# Altium PCB PIPOCPUF_2006.PCBDOC (part 3 of 6)
Units mil, origin at the board's own origin, x right, y up, seen from the top; angles counter-clockwise.
Board outline 8500 x 4525 mil, 2 copper layers (Top Layer, Top, Bottom Layer, Bottom); 345 components, 259 nets, 1116 pads, 603 vias.
Unrouted connection lines stored in the file: 781.
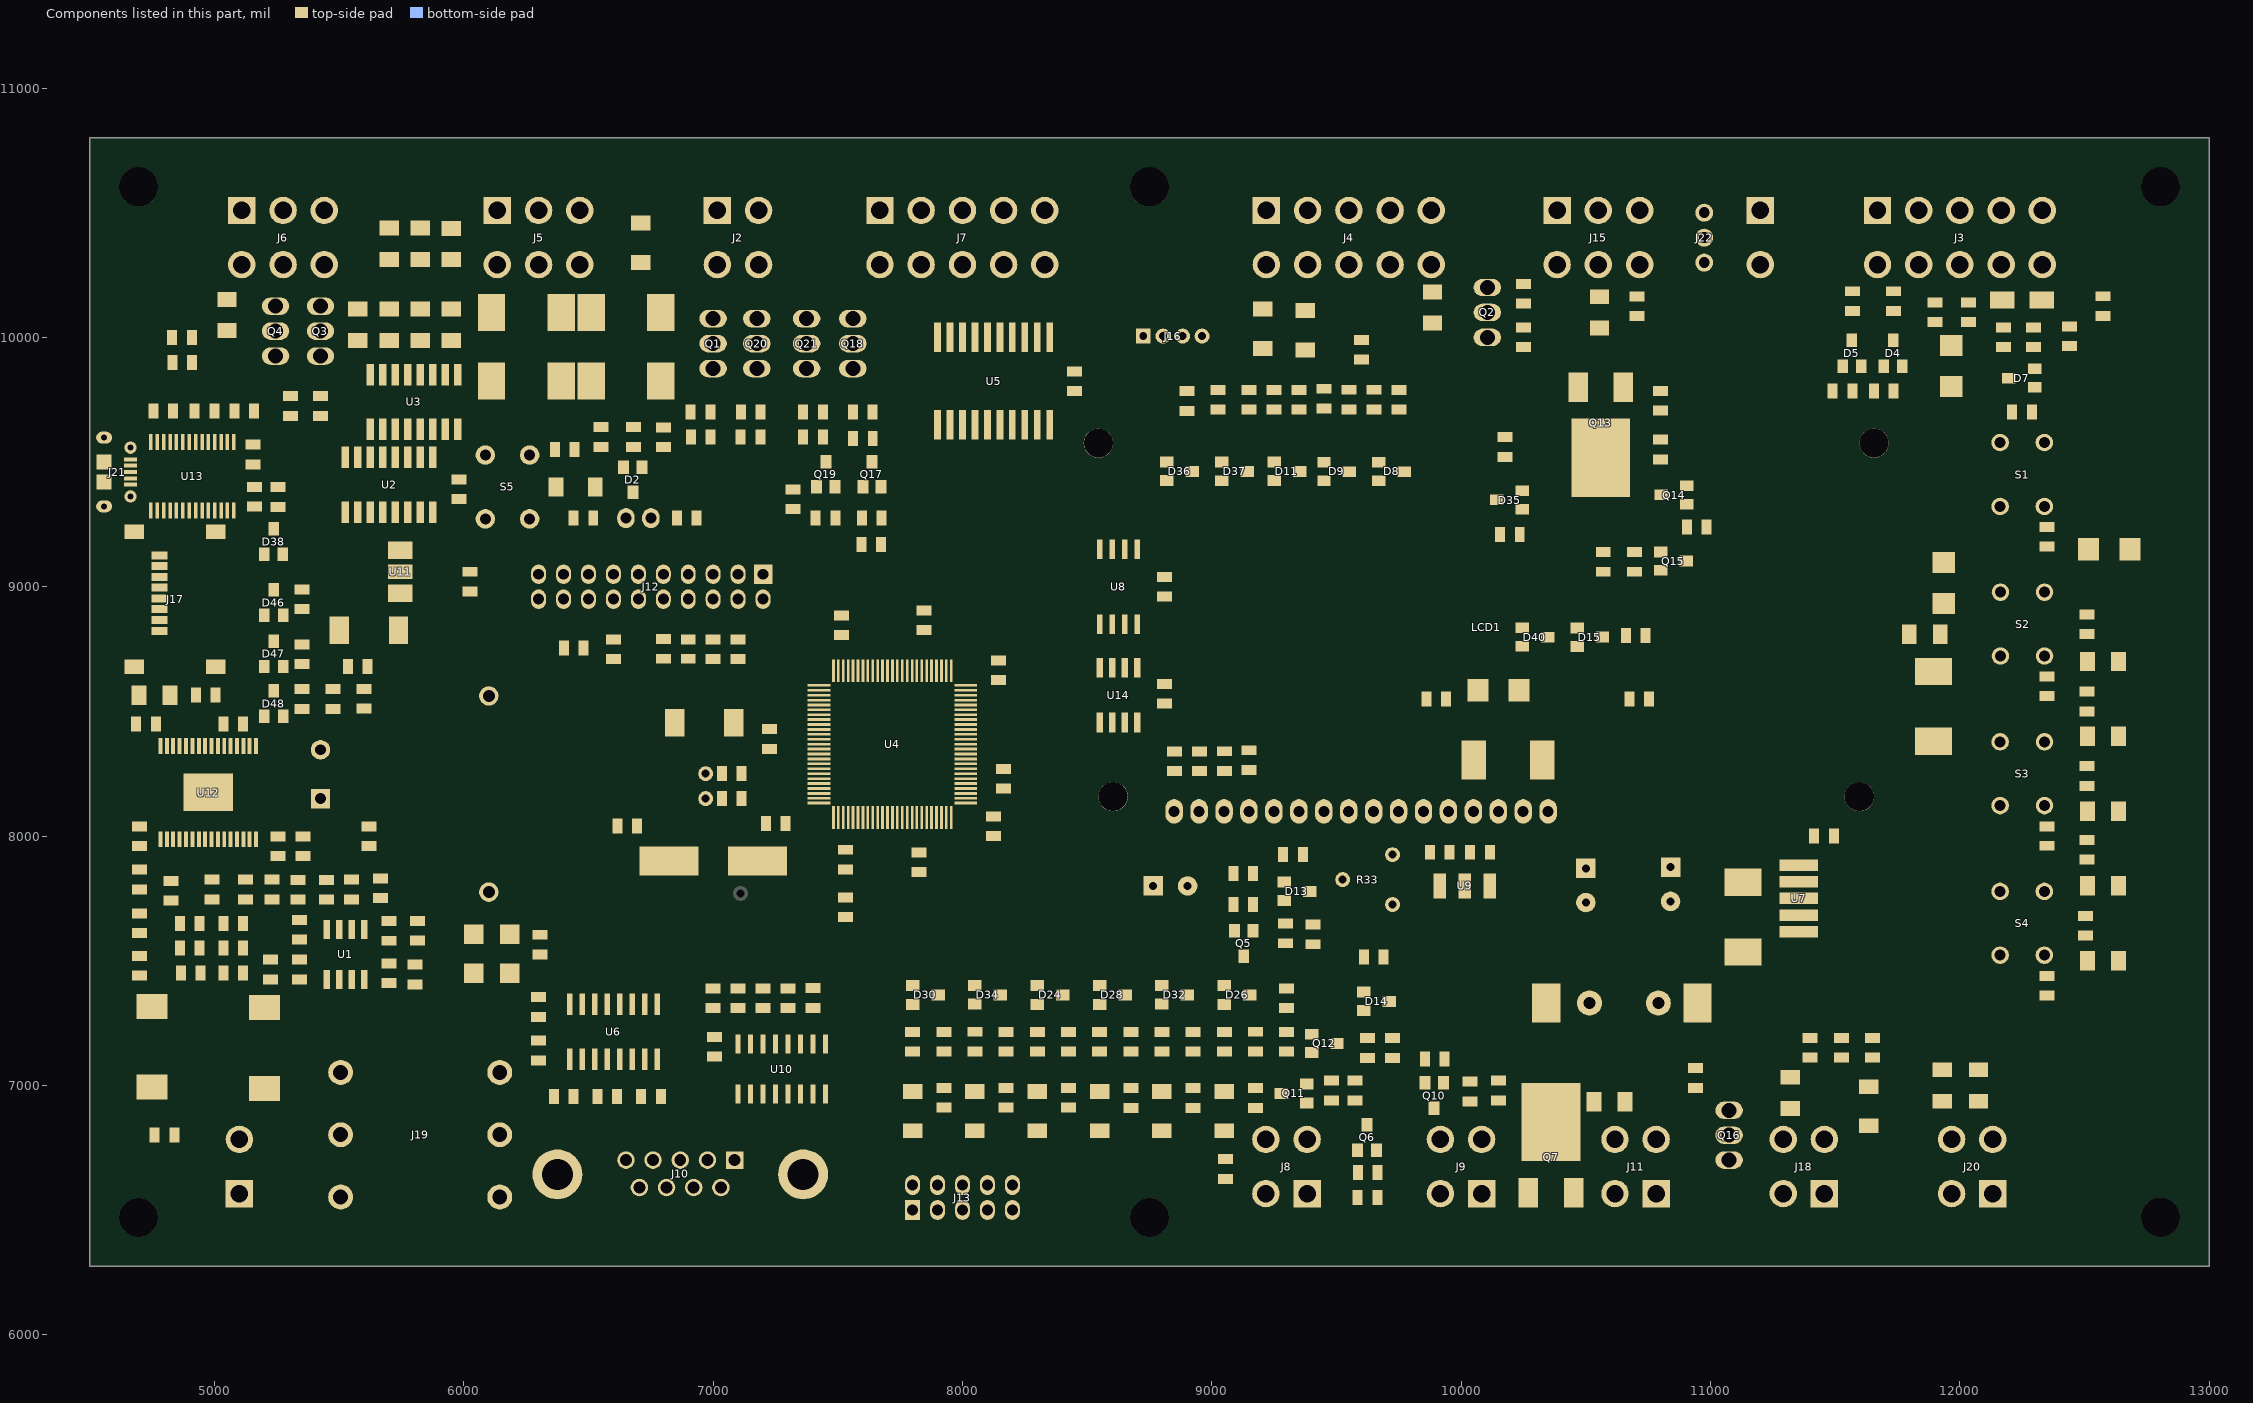
[diagram p3: the components of this part, seen from the top]

## Via types
v1: diameter 28, hole 16, Top Layer, Top to Bottom Layer, Bottom, 595 vias
v2: diameter 36, hole 24, Top Layer, Top to Bottom Layer, Bottom, 4 vias
v3: diameter 40, hole 24, Top Layer, Top to Bottom Layer, Bottom, 4 vias

## Nets (pads, with @x,y where several pads share a name; then routed paths per layer and width w, separated by ;. In a path a pad name is that pad's centre, name@x,y a point inside that pad or via, vN(x,y) a via of type N, cw(c..) or ccw(c..) an arc to the next point about the centre after c; other vN are vias at no path point) (continued)
copper on no net: (continued)
  Top Layer, Top w20: 4729,8739 5156,8739 ; 4729,8754 5156,8754 ; 4729,8769 5156,8769 ; 4729,8784 4733,8784 ; 4785,8955 v1(4840,8955) ; 4826,8784 5156,8784 ; 4830,9900 4830,10000 v1@4830,10285 ; 4836,8799 5156,8799 ; 4838,8814 5156,8814 ; 4888,8874 5152,8874 ; 4889,8859 5152,8859 ; 4889,8889 5152,8889 ; 4906,8904 5152,8904 ; 4915,9905 v1(4970,9905) ; 4915,10000 4945,10000 5025,9920 5230,9920 5305,9845 5305,9765 ; 4921,8919 5154,8919 ; 4936,8934 5156,8934 ; 4951,8949 5156,8949 ; 4962,9144 5072,9144 ; 4965,8964 5156,8964 ; 4966,9159 5057,9159 ; 4971,8979 5156,8979 ; 4973,8994 5156,8994 ; 4973,9009 5156,9009 ; 4973,9024 5156,9024 ; 4973,9039 5156,9039 ; 4973,9054 5156,9054 ; 4973,9069 5156,9069 ; 4973,9084 5145,9084 ; 4976,9129 5087,9129 ; 4978,9099 5117,9099 ; 4980,9114 5102,9114 ; v1(5150,8530) 5150,8525 5195,8480 5195,9125 5195,9130 ; 5155,9490 5185,9490 v1(5215,9520) ; 5156,8829 4870,8829 ; 5165,9690 5215,9640 v1@5215,9525 ; 5253,9566 5381,9566 ; 5253,9581 5381,9581 ; 5253,9596 5381,9596 ; 5253,9611 5378,9611 ; 5253,9626 5382,9626 ; 5260,9641 5262,9641 ; 5275,8500 5335,8500 ; 5275,8680 5350,8680 ; 5285,8490 5285,9125 ; 5290,8900 5360,8900 ; 5290,9135 5295,9140 v1(5295,9230) ; 5292,9536 5381,9536 ; 5298,9521 5381,9521 ; 5299,9446 5381,9446 ; 5299,9461 5381,9461 ; 5299,9476 5381,9476 ; 5299,9491 5381,9491 ; 5299,9506 5381,9506 ; 5305,9356 5381,9356 ; 5308,9431 5381,9431 ; 5309,9371 5381,9371 ; 5311,9386 5381,9386 ; 5311,9401 5381,9401 ; 5311,9416 5381,9416 ; 5331,9341 5381,9341 ; 5346,9326 5381,9326 ; 5347,9641 5382,9641 ; 5356,9311 5381,9311 ; 5358,9716 5371,9716 ; 5358,9731 5371,9731 ; 5359,9656 5370,9656 ; 5361,9671 5368,9671 ; 5361,9686 5368,9686 ; 5361,9701 5368,9701 ; 5361,9746 5368,9746 ; 5362,9296 5381,9296 ; v1@5363,9131 5381,9131 ; v1@5363,9146 v1@5381,9146 ; 5363,9161 5381,9161 ; 5363,9176 5381,9176 ; 5363,9191 5381,9191 ; 5363,9206 5381,9206 ; 5363,9221 5381,9221 ; 5363,9236 5381,9236 ; 5363,9251 5381,9251 ; v1@5363,9266 5381,9266 ; v1@5363,9281 v1@5381,9281 ; 5366,9116 5381,9116 ; 5381,9551 5286,9551 ; v1(5420,9610) 5420,8525 5450,8495 5475,8495 5595,8375 5595,8185 5675,8105 5675,7925 5660,7910 v1(5660,7900) ; 5425,9765 5425,9925 ; 5457,9626 5583,9626 ; v1@5458,8921 5543,8921 ; v1@5458,8936 5558,8936 ; 5458,8951 5573,8951 ; 5458,8966 5580,8966 ; 5458,8981 5580,8981 ; 5458,8996 5580,8996 ; 5458,9011 5580,9011 ; 5458,9026 5580,9026 ; 5458,9041 5580,9041 ; 5458,9056 5580,9056 ; 5458,9071 5580,9071 ; 5458,9086 5580,9086 ; 5458,9101 5583,9101 ; 5458,9116 5589,9116 ; 5458,9131 5598,9131 ; 5458,9146 5613,9146 ; v1@5458,9161 5628,9161 ; v1@5458,9176 5636,9176 ; 5458,9191 5565,9191 ; 5458,9206 5542,9206 ; 5458,9221 5535,9221 ; 5458,9236 5493,9236 ; 5458,9251 5484,9251 ; 5458,9266 5483,9266 ; v1@5458,9281 5483,9281 ; v1@5458,9296 5483,9296 ; 5458,9311 5483,9311 ; 5458,9326 5483,9326 ; 5458,9341 5483,9341 ; 5458,9356 5487,9356 ; 5458,9371 5686,9371 ; 5458,9386 5686,9386 ; 5458,9401 5686,9401 ; 5458,9416 5497,9416 ; 5458,9431 5487,9431 ; 5458,9446 5483,9446 ; 5458,9461 5486,9461 ; 5458,9476 5483,9476 ; 5458,9491 5483,9491 ; 5458,9506 5483,9506 ; 5458,9521 5483,9521 ; 5458,9536 5483,9536 ; 5458,9551 5483,9551 ; 5458,9566 5484,9566 ; 5458,9581 5492,9581 ; 5458,9596 5583,9596 ; 5461,9611 5583,9611 ; 5466,9641 5583,9641 ; 5478,9731 5589,9731 ; 5481,9746 5591,9746 ; 5505,9716 5585,9716 ; 5507,9656 5583,9656 ; 5517,9671 5583,9671 ; 5517,9701 5585,9701 ; 5521,9686 5586,9686 ; v1(5525,9445) 5525,9519 5525,9520 ; 5545,7830 v1@5545,7885 ; 5552,9416 5686,9416 ; 5562,9431 5686,9431 ; 5566,9446 5683,9446 ; v1(5575,9230) 5575,9299 ; 5584,9191 5621,9191 ; 5667,9710 5666,9710 ; 5682,9710 6136,9710 ; 5700,9987 5700,9937 5725,9912 5725,9851 ; 5700,10113 v1(5700,10187) ; 5700,10312 5700,10275 5762,10213 5762,10175 5762,9925 5775,9912 5775,9851 ; 5700,10438 5712,10437 5762,10387 v1(5762,10375) ; 5707,9725 6048,9725 ; 5712,8715 5756,8715 ; 5713,9740 6031,9740 ; 5725,9320 v1(5725,9445) ; 5727,8730 5756,8730 ; 5745,8815 5795,8765 v1(5795,8340) ; 5750,7920 5861,7920 ; 5750,7935 5861,7935 ; 5750,7950 5861,7950 ; 5750,7965 5861,7965 ; 5750,7980 5861,7980 ; 5750,7995 5861,7995 ; 5750,8010 5861,8010 ; 5750,8025 5861,8025 ; 5750,8040 5861,8040 ; 5750,8055 5861,8055 ; 5750,8070 5861,8070 ; 5750,8085 5861,8085 ; 5750,8100 5861,8100 ; 5750,8115 5861,8115 ; 5750,8130 5861,8130 ; 5750,8145 5861,8145 ; 5750,8160 5861,8160 ; 5750,8175 5861,8175 ; 5750,8190 5861,8190 ; 5750,8205 5861,8205 ; 5750,8220 5861,8220 ; 5750,8235 5861,8235 ; 5750,8250 5861,8250 ; 5750,8265 5861,8265 ; 5750,8280 5861,8280 ; 5750,8295 5861,8295 ; 5750,8310 5768,8310 ; 5750,8325 5757,8325 ; 5750,8340 5753,8340 ; 5750,8355 5756,8355 ; 5750,8370 5756,8370 ; 5750,8385 5756,8385 ; 5750,8400 5756,8400 ; 5750,8415 5756,8415 ; 5750,8430 5756,8430 ; 5750,8445 5756,8445 ; 5750,8460 5756,8460 ; 5750,8475 5756,8475 ; 5750,8490 5756,8490 ; 5750,8505 5756,8505 ; 5750,8520 5756,8520 ; 5750,8535 5756,8535 ; 5750,8550 5756,8550 ; 5750,8565 5756,8565 ; 5750,8580 5756,8580 ; 5750,8595 5756,8595 ; 5750,8610 5756,8610 ; 5750,8625 5756,8625 ; 5750,8640 5756,8640 ; 5750,8655 5756,8655 ; 5750,8670 5756,8670 ; 5750,8685 5756,8685 ; 5752,7905 5861,7905 ; 5756,8700 5697,8700 ; 5760,9070 v1(5825,9070) ; 5767,7890 5861,7890 ; 5780,8970 v1(5825,8970) ; 5780,9065 5785,9070 v1(5825,9070) ; 5782,7875 5861,7875 ; 5797,7860 5861,7860 ; 5807,7845 5861,7845 ; 5813,7815 5861,7815 ; 5821,8310 5861,8310 ; 5825,9851 5825,9962 5825,9987 ; 5825,10113 v1(5825,10175) ; 5825,10312 5825,10237 5887,10175 5887,9924 5875,9912 5875,9851 ; 5825,10420 5825,10510 5930,10615 6395,10615 6462,10550 6465,10509 ; 5825,10438 5825,10488 5825,10487 ; 5832,8325 5861,8325 ; v1(5860,8385) 5860,8985 5860,9040 v1(5825,9070) ; 5861,7830 5813,7830 ; 5861,8340 5836,8340 ; 5875,9270 5875,9335 5895,9355 5970,9355 ; 5875,9299 5875,9285 5875,9245 v1(5890,9230) ; 5925,9851 5925,9937 5950,9962 5950,9987 ; 5950,10113 5950,10199 5887,10262 5887,10512 5960,10585 6225,10585 6312,10500 6300,10509 ; 5975,9345 v1(6040,9345) ; 6005,9695 6134,9695 ; 6015,9680 6138,9680 ; 6016,9635 6141,9635 ; 6016,9650 6141,9650 ; 6016,9665 6141,9665 ; 6019,9545 6023,9545 ; 6019,9560 6027,9560 ; 6019,9575 6041,9575 ; 6019,9590 6068,9590 ; 6019,9605 6141,9605 ; 6019,9620 6141,9620 ; 6025,9060 6025,9065 6025,9080 6045,9100 v1(6055,9100) ; 6030,8980 6095,8980 ; 6031,7845 6301,7845 ; 6031,7860 6301,7860 ; 6031,7875 6301,7875 ; 6032,7815 6048,7815 ; 6032,7830 6063,7830 ; 6066,7890 6301,7890 ; 6078,7950 6301,7950 ; 6078,7965 6301,7965 ; 6078,7980 6301,7980 ; 6078,7995 6301,7995 ; 6078,8010 6301,8010 ; 6078,8025 6301,8025 ; 6078,8040 6301,8040 ; 6078,8055 6301,8055 ; 6078,8070 6301,8070 ; 6078,8085 6301,8085 ; 6078,8100 6301,8100 ; 6078,8115 6301,8115 ; 6078,8130 6301,8130 ; 6078,8145 6301,8145 ; 6078,8160 6301,8160 ; 6078,8175 6301,8175 ; 6078,8190 6301,8190 ; 6078,8205 6301,8205 ; 6078,8220 6301,8220 ; 6078,8235 6301,8235 ; 6078,8250 6301,8250 ; 6078,8265 6301,8265 ; 6078,8280 6301,8280 ; 6078,8295 6301,8295 ; 6078,8310 6301,8310 ; 6078,8325 6301,8325 ; 6078,8340 6301,8340 ; 6078,8355 6301,8355 ; 6078,8370 6301,8370 ; 6078,8385 6301,8385 ; 6078,8400 6301,8400 ; 6081,7905 6301,7905 ; 6083,7935 6301,7935 ; 6085,7920 6301,7920 ; 6103,9590 6141,9590 ; 6130,9575 6141,9575 ; 6131,8415 6301,8415 ; 6136,7830 6301,7830 ; 6138,8430 6301,8430 ; 6144,8460 6293,8460 ; 6144,8475 6297,8475 ; 6144,8490 6308,8490 ; 6144,8505 6336,8505 ; 6144,8610 6332,8610 ; 6144,8625 6317,8625 ; 6144,8640 6302,8640 ; 6144,8655 6287,8655 ; 6144,8670 6272,8670 ; 6144,8685 6257,8685 ; 6144,8700 6242,8700 ; 6144,8715 6227,8715 ; 6144,8730 6212,8730 ; 6144,8745 6197,8745 ; 6144,8760 6182,8760 ; 6144,8775 6167,8775 ; v1@6144,8790 v1@6152,8790 ; v1@6144,8805 v1@6145,8805 ; 6149,8520 6336,8520 ; 6151,7815 6301,7815 ; 6160,8535 6336,8535 ; 6162,8580 6336,8580 ; 6164,8550 6336,8550 ; 6166,8565 6336,8565 ; 6297,8445 6144,8445 ; 6300,7100 6295,7100 6355,7100 6375,7120 6375,7155 6395,7175 6460,7175 6475,7160 6475,7105 ; 6300,7179 6300,7265 6300,7275 6380,7275 6400,7255 6460,7255 6475,7270 6475,7325 ; 6300,7354 6315,7365 6320,7370 6410,7370 6425,7355 6425,7325 v1(6385,7325) ; 6336,8595 6158,8595 ; 6361,6955 6360,7015 6425,7080 6425,7105 ; v1@6400,7465 v1@6791,7465 ; 6400,7480 6788,7480 ; 6400,7495 6784,7495 ; 6400,8770 6400,8950 6400,8965 ; 6406,7510 6786,7510 ; 6431,7525 6793,7525 ; 6439,6955 6450,6960 ; 6445,9555 6540,9555 ; 6446,7540 6819,7540 ; 6450,6985 6525,7060 6525,7105 ; 6450,7555 6458,7555 ; 6511,7555 6911,7555 ; 6518,7615 6911,7615 ; 6518,7630 6911,7630 ; 6518,7645 6911,7645 ; 6518,7660 6911,7660 ; 6518,7675 6911,7675 ; 6518,7690 6911,7690 ; 6518,7705 6631,7705 ; 6518,7720 6607,7720 ; 6518,7735 6592,7735 ; 6518,7750 v1@6577,7750 ; 6518,7765 6562,7765 ; 6518,7780 6547,7780 ; 6518,7795 6532,7795 ; v1(6520,9220) 6520,9265 ; 6522,7570 6911,7570 ; 6522,7600 6911,7600 ; 6525,7325 6525,7220 6565,7180 6795,7180 6820,7155 6820,7060 6845,7035 6845,6785 6813,6752 6813,6672 6845,6640 6890,6640 6950,6700 6977,6700 ; 6527,9400 6527,9358 6560,9325 6560,9135 6550,9125 6550,8730 6570,8710 6605,8710 6600,8710 v1(6600,8660) 6535,8595 6535,7985 6605,7915 v1(6605,7905) ; 6536,6955 6535,7010 6575,7050 6575,7105 ; 6545,9400 6545,9550 ; 6545,9640 6795,9640 ; 6555,9565 6635,9485 ; 6573,8445 6580,8445 ; 6573,8460 6780,8460 ; 6573,8475 6780,8475 ; 6573,8490 6780,8490 ; 6573,8505 6780,8505 ; 6573,8520 6782,8520 ; 6573,8535 6802,8535 ; 6573,8550 7206,8550 ; v1@6573,8565 7206,8565 ; 6575,7325 6575,7245 6610,7210 6820,7210 6855,7175 6855,7080 6885,7050 6885,6770 6868,6753 6868,6700 ; 6575,8580 6942,8580 ; v1(6580,8385) 6585,8395 6610,8420 6625,8420 6840,8420 ; v1(6580,10300) 6580,10405 6635,10460 6695,10460 ; 6590,8595 6827,8595 ; 6605,8610 6813,8610 ; 6615,6955 6625,6970 6625,7105 ; 6622,8625 6809,8625 ; 6636,8640 6811,8640 ; 6640,8655 6816,8655 ; 6647,8670 6753,8670 ; 6650,6700 6790,6840 v1(6790,6860) 6790,6955 6790,6980 ; 6651,8283 6924,8283 ; 6651,8745 6702,8745 ; 6654,8760 6702,8760 ; 6655,8685 6740,8685 ; 6656,8700 6725,8700 ; 6656,8715 6712,8715 ; 6656,8775 6702,8775 ; 6656,8790 6702,8790 ; 6657,8268 6916,8268 ; 6659,8103 6877,8103 ; 6659,8118 6882,8118 ; 6659,8133 6897,8133 ; 6659,8148 6912,8148 ; 6659,8163 6915,8163 ; 6659,8178 6919,8178 ; 6659,8193 6934,8193 ; 6659,8208 6932,8208 ; 6659,8223 6919,8223 ; 6659,8238 6915,8238 ; 6659,8253 6912,8253 ; 6659,8805 6702,8805 ; 6670,9650 6670,10295 ; 6674,8820 6702,8820 ; 6675,7105 6675,6990 6710,6955 6711,6955 ; 6681,8835 6702,8835 ; 6687,8865 6702,8865 ; 6687,8880 6708,8880 ; 6702,8850 6687,8850 ; 6705,8730 6656,8730 ; 6725,9470 6760,9470 6775,9485 v1(6800,9485) ; 6732,8088 6883,8088 ; 6739,8073 6893,8073 ; 6800,9570 6800,9560 6800,9550 ; 6830,7540 6911,7540 ; v1(6850,9700) 6915,9700 ; 6856,7525 6911,7525 ; 6858,7465 6911,7465 ; 6861,7480 6911,7480 ; 6863,7510 6911,7510 ; 6865,7495 6911,7495 ; 6872,8595 6917,8595 ; 6886,8610 6911,8610 ; 6889,8535 7039,8535 ; 6890,8625 6910,8625 ; 6900,8950 6950,9000 6950,9265 6940,9275 6940,9325 v1@6925,9340 ; 6909,8520 7019,8520 ; 6911,7585 6526,7585 ; 6911,8430 7017,8430 ; 6911,8445 7017,8445 ; 6911,8460 7017,8460 ; 6911,8475 7017,8475 ; 6911,8490 7017,8490 ; 6911,8505 7017,8505 ; v1@6930,9345 v1(6930,9485) ; 6939,8298 6641,8298 ; 6944,9523 7151,9523 ; 6950,9538 7151,9538 ; 6957,8580 7206,8580 ; 6963,9508 7151,9508 ; 6968,9358 7151,9358 ; 6968,9373 7151,9373 ; 6968,9388 7151,9388 ; 6968,9403 7151,9403 ; v1@6968,9418 7151,9418 ; 6968,9433 7151,9433 ; 6968,9448 7151,9448 ; 6968,9463 7151,9463 ; 6969,9478 7151,9478 ; 6969,9493 7151,9493 ; 6971,9343 v1@7151,9343 ; 6974,7720 7080,7720 ; 6977,9328 7151,9328 ; 6978,7495 7357,7495 ; 6978,7510 7344,7510 ; 6978,7525 7338,7525 ; 6978,7540 7336,7540 ; 6978,7555 7336,7555 ; 6978,7570 7336,7570 ; 6978,7585 7336,7585 ; 6978,7600 7336,7600 ; 6978,7615 7336,7615 ; 6978,7630 7336,7630 ; 6978,7645 7336,7645 ; 6978,7660 7336,7660 ; 6978,7675 7336,7675 ; 6978,7690 7336,7690 ; 6978,7705 7336,7705 ; 6978,9313 7151,9313 ; 6980,9298 7151,9298 ; 6981,9283 7152,9283 ; 6982,8595 7037,8595 ; 6987,9268 7158,9268 ; 6988,8610 7012,8610 ; 6988,9118 7161,9118 ; 6988,9133 7161,9133 ; 6988,9148 7161,9148 ; 6988,9163 7161,9163 ; 6988,9178 7161,9178 ; 6988,9193 7161,9193 ; 6988,9208 7159,9208 ; 6988,9223 7162,9223 ; 6988,9238 7171,9238 ; 6988,9253 7169,9253 ; 6989,8625 7006,8625 ; 6990,9605 6990,9870 ; 7000,7400 v1(7000,7450) ; 7005,7195 v1(7005,7240) ; 7026,7480 7168,7480 ; 7028,9748 7072,9748 ; 7029,9553 7070,9553 ; 7032,9658 7067,9658 ; 7035,9103 7065,9103 ; 7035,9673 7064,9673 ; 7035,9688 7064,9688 ; 7035,9703 7064,9703 ; 7035,9718 7064,9718 ; 7035,9733 7064,9733 ; 7036,9568 7063,9568 ; 7036,9583 7063,9583 ; 7036,9598 7063,9598 ; 7036,9613 7063,9613 ; 7036,9628 7063,9628 ; v1@7037,7465 7161,7465 ; 7052,8595 7206,8595 ; 7077,8610 7206,8610 ; 7083,8625 7187,8625 ; 7085,8435 7225,8435 ; 7100,7165 7100,7215 7120,7230 v1(7120,7260) ; v1(7100,8670) 7100,8710 ; 7115,9595 7115,9815 7175,9875 ; 7126,8535 v1@7206,8535 ; 7127,8640 7147,8640 ; 7135,9103 7140,9103 ; 7139,7720 7336,7720 ; 7146,8520 7206,8520 ; 7148,8475 7152,8475 ; 7148,8490 7216,8490 ; 7148,8505 7210,8505 ; 7157,8475 7194,8475 ; 7162,8640 7173,8640 ; 7195,9700 7270,9700 ; 7200,8950 7200,9050 v1(7200,9210) ; 7231,7480 7372,7480 ; v1@7238,7465 7362,7465 ; v1(7270,9895) 7270,9700 ; v1(7350,6860) 7350,6960 ; 7355,9700 7270,9700 ; 7375,9870 7440,9805 7440,9600 ; v1(7400,6860) 7400,6965 ; 7400,7390 v1(7400,7450) ; 7408,8832 7426,8832 ; 7408,8847 7426,8847 ; 7408,8862 7426,8862 ; 7408,8877 7426,8877 ; 7408,8892 7426,8892 ; 7408,8907 7426,8907 ; 7408,8922 7426,8922 ; 7408,8937 7426,8937 ; 7408,8952 7426,8952 ; 7408,8967 7426,8967 ; 7408,8982 7426,8982 ; 7408,8997 7426,8997 ; 7408,9012 7426,9012 ; 7408,9027 7426,9027 ; 7408,9042 7426,9042 ; 7408,9057 7426,9057 ; 7408,9072 7426,9072 ; 7408,9087 7420,9087 ; 7408,9102 7420,9102 ; 7408,9117 7425,9117 ; 7408,9132 7443,9132 ; 7408,9147 7548,9147 ; 7408,9162 7548,9162 ; 7408,9177 7548,9177 ; 7408,9192 7548,9192 ; 7408,9207 7549,9207 ; 7444,9222 7456,9222 ; v1(7450,6860) 7450,6960 ; 7476,9132 7550,9132 ; 7479,9747 7520,9747 ; 7483,9642 7521,9642 ; 7483,9657 7516,9657 ; 7486,9567 7514,9567 ; 7486,9582 7514,9582 ; 7486,9597 7514,9597 ; 7486,9612 7514,9612 ; 7486,9627 7514,9627 ; 7486,9672 7513,9672 ; 7486,9687 7513,9687 ; 7486,9702 7513,9702 ; 7486,9717 7513,9717 ; 7486,9732 7513,9732 ; 7493,8937 7547,8937 ; 7493,8952 7547,8952 ; 7493,8967 7547,8967 ; 7493,8982 7547,8982 ; 7493,8997 7547,8997 ; 7493,9012 7547,9012 ; 7493,9027 7547,9027 ; 7493,9042 7547,9042 ; 7493,9057 7547,9057 ; 7493,9072 7542,9072 ; 7494,9117 7557,9117 ; 7497,9462 7591,9462 ; 7499,9087 7540,9087 ; 7499,9102 7544,9102 ; 7517,9552 7487,9552 ; 7523,9222 7557,9222 ; 7524,9537 7590,9537 ; 7527,9447 7561,9447 ; 7528,9477 7588,9477 ; 7531,9327 7558,9327 ; 7533,9342 7558,9342 ; 7534,9237 7551,9237 ; 7534,9357 7557,9357 ; v1(7535,7490) 7535,7670 ; 7535,9312 7550,9312 ; 7536,9252 7549,9252 ; 7536,9267 7549,9267 ; 7536,9282 7549,9282 ; 7536,9297 7549,9297 ; 7536,9432 7552,9432 ; 7536,9522 7588,9522 ; 7537,9372 7551,9372 ; 7537,9387 7551,9387 ; 7537,9402 7551,9402 ; 7537,9417 7551,9417 ; 7537,9492 7588,9492 ; 7540,9507 7588,9507 ; 7580,10055 7610,10055 7665,10000 7665,9735 7630,9700 v1(7700,9700) ; 7685,10505 7750,10440 7750,10210 7900,10060 7900,10040 ; 7800,7215 7800,7315 ; 7800,7396 7800,7400 v1(7800,7451) ; v1(7820,7495) 7820,7855 ; 7900,9640 7900,9990 ; 7923,8855 7929,8855 ; 7923,8870 7933,8870 ; 7923,8885 7948,8885 ; 7923,8900 7983,8900 ; 7923,8915 8010,8915 ; 7923,8930 8036,8930 ; 7923,8945 8036,8945 ; 7923,8960 8036,8960 ; 7923,8975 8036,8975 ; 7923,8990 8036,8990 ; 7923,9005 8036,9005 ; 7923,9020 8036,9020 ; 7923,9035 8036,9035 ; 7923,9050 8036,9050 ; 7923,9065 8036,9065 ; 7923,9080 8036,9080 ; 7923,9095 8036,9095 ; 7923,9110 8036,9110 ; 7923,9125 8036,9125 ; 7923,9140 8036,9140 ; 7923,9155 8036,9155 ; 7923,9170 8036,9170 ; 7923,9185 8036,9185 ; 7923,9200 8036,9200 ; 7923,9215 8036,9215 ; 7923,9230 8036,9230 ; 7923,9245 8036,9245 ; 7923,9260 8036,9260 ; 7923,9275 8023,9275 ; 7923,9290 8012,9290 ; 7923,9305 8008,9305 ; 7923,9320 8012,9320 ; 7923,9335 8023,9335 ; 7923,9350 8027,9350 ; 7923,9365 8012,9365 ; 7923,9380 7997,9380 ; 7923,9395 7944,9395 ; v1(7925,6860) 7925,6911 7925,6915 ; v1(7950,9825) 7950,9975 ; 7955,9395 7982,9395 ; 8019,8915 v1@8036,8915 ; 8042,7495 8204,7495 ; 8050,7216 8050,7316 ; 8050,7396 8050,7400 v1(8050,7451) ; 8057,7510 8206,7510 ; 8072,7525 8205,7525 ; 8077,7480 8208,7480 ; 8085,7540 8205,7540 ; 8087,7465 8207,7465 ; 8091,7555 8205,7555 ; 8093,7570 8205,7570 ; 8093,7585 8205,7585 ; 8093,7600 8205,7600 ; 8093,7615 8205,7615 ; 8093,7630 8205,7630 ; 8093,7645 8204,7645 ; 8093,7660 8204,7660 ; 8093,7675 8204,7675 ; 8093,7690 8164,7690 ; 8093,7705 8158,7705 ; 8093,7720 8152,7720 ; 8093,7735 8150,7735 ; 8093,7750 8150,7750 ; 8093,7765 8150,7765 ; 8093,7780 8150,7780 ; 8093,7795 8150,7795 ; 8093,7810 8150,7810 ; 8093,7825 8150,7825 ; 8093,7840 8150,7840 ; 8093,7855 8150,7855 ; 8093,7870 8150,7870 ; 8093,7885 8150,7885 ; 8093,7900 8150,7900 ; 8093,7915 8150,7915 ; 8093,7930 8150,7930 ; 8093,7945 8150,7945 ; 8130,8000 8185,8000 ; v1(8175,6860) 8175,6911 8175,6915 ; 8185,8265 8185,8260 8225,8220 8225,8135 8240,8120 8245,7510 v1(8245,7500) ; 8300,7215 8300,7315 ; 8300,7396 8300,7400 v1(8300,7451) ; 8300,9665 v1(8300,9825) ; 8350,9665 v1(8350,9825) ; 8398,7540 8616,7540 ; 8398,7555 8616,7555 ; 8398,7570 8616,7570 ; 8398,7585 8612,7585 ; 8398,7600 8608,7600 ; 8398,7615 8612,7615 ; 8398,7630 8623,7630 ; 8398,7645 8850,7645 ; 8398,7660 8850,7660 ; 8398,7675 8850,7675 ; 8398,7690 8850,7690 ; 8398,7705 8850,7705 ; 8398,7720 8850,7720 ; 8398,7735 8423,7735 ; 8398,7750 8408,7750 ; 8398,7765 8404,7765 ; 8398,7780 8406,7780 ; 8398,7795 8413,7795 ; 8398,7810 8421,7810 ; 8398,7825 8421,7825 ; 8398,7840 8421,7840 ; 8402,7525 8617,7525 ; 8417,7510 8617,7510 ; v1(8425,6860) 8425,6911 8425,6915 ; 8432,7495 8617,7495 ; 8440,9785 8450,9785 8500,9785 8525,9810 v1(8525,9825) ; 8447,7480 8522,7480 ; 8450,9870 v1(8450,9915) ; 8462,7465 8512,7465 ; 8466,7735 8722,7735 ; 8468,7945 8751,7945 ; 8468,7960 8501,7960 ; 8468,7975 8477,7975 ; 8477,7930 8746,7930 ; 8481,7750 8702,7750 ; 8484,7915 8744,7915 ; 8485,7765 8699,7765 ; 8488,7795 8699,7795 ; 8488,7810 8699,7810 ; 8488,7825 8699,7825 ; 8488,7840 8699,7840 ; 8488,7855 8705,7855 ; 8488,7870 8993,7870 ; 8488,7885 8763,7885 ; 8488,7900 8748,7900 ; 8523,9212 8525,9212 ; 8523,9227 8611,9227 ; 8523,9242 8605,9242 ; 8529,9257 8605,9257 ; 8544,9272 8610,9272 ; 8550,7215 8550,7315 ; 8550,7396 8550,7400 v1(8550,7451) ; v1(8550,9075) 8550,9135 ; 8559,9287 8629,9287 ; 8574,9302 8786,9302 ; 8577,7480 8617,7480 ; 8587,7465 8617,7465 ; 8589,9317 8786,9317 ; v1(8600,8605) 8600,8665 ; v1(8600,9075) 8600,9150 ; 8604,9332 8786,9332 ; 8619,9347 8786,9347 ; 8634,9362 8786,9362 ; 8649,9377 8786,9377 ; 8650,8455 8650,8620 8650,8675 8650,8835 8650,8850 v1(8650,9075) ; 8660,9287 8786,9287 ; 8664,9392 8769,9392 ; v1(8675,6859) 8675,6910 8675,6914 ; 8676,7630 8850,7630 ; 8678,9227 8786,9227 ; 8679,9272 8786,9272 ; 8679,9407 8766,9407 ; 8683,7555 8850,7555 ; 8683,7570 8850,7570 ; 8684,7465 8762,7465 ; 8684,7480 8772,7480 ; 8684,7495 8815,7495 ; 8684,7510 8821,7510 ; 8684,7525 8827,7525 ; 8684,7540 8850,7540 ; 8684,9242 8786,9242 ; 8684,9257 8786,9257 ; 8687,7585 8850,7585 ; 8687,7615 8850,7615 ; 8694,9422 8766,9422 ; 8699,7780 8488,7780 ; 8700,8695 v1(8700,8745) ; 8700,8845 8700,8850 v1(8700,8920) ; 8703,7960 8751,7960 ; 8709,9437 8766,9437 ; v1@8724,9452 8767,9452 ; 8727,7975 8751,7975 ; 8735,9197 8786,9197 ; 8736,9107 8770,9107 ; 8737,9122 8782,9122 ; 8737,9137 8786,9137 ; 8737,9152 8786,9152 ; 8737,9167 8786,9167 ; 8737,9182 8786,9182 ; 8739,9467 8768,9467 ; 8742,7990 8751,7990 ; 8745,9092 8761,9092 ; 8745,9482 8766,9482 ; 8748,9497 8766,9497 ; 8748,9512 8766,9512 ; 8748,9527 8767,9527 ; 8748,9542 8776,9542 ; 8748,9557 8770,9557 ; 8748,9572 8764,9572 ; 8748,9587 8761,9587 ; 8748,9602 8761,9602 ; 8748,9617 8761,9617 ; 8748,9632 8761,9632 ; 8748,9647 8761,9647 ; 8748,9662 8761,9662 ; 8748,9677 8761,9677 ; 8748,9692 8761,9692 ; 8748,9707 8761,9707 ; 8748,9722 8761,9722 ; 8748,9737 8761,9737 ; 8786,9212 8724,9212 ; 8800,7216 8800,7316 ; 8800,7396 8800,7400 v1(8800,7451) ; 8800,9035 8840,9035 8865,9010 v1(8865,8745) 8865,8715 8825,8675 8825,8620 ; 8800,9045 v1(8800,9080) ; v1@8800,9085 8825,9110 8825,9375 8825,9425 ; 8800,10020 v1(8800,9825) 8800,9580 v1@8820,9560 ; 8806,7885 9008,7885 ; 8807,7735 8850,7735 ; v1(8810,8910) 8810,8960 ; 8815,8535 8855,8535 8875,8555 v1(8875,8615) ; 8818,7945 9208,7945 ; 8818,7960 9234,7960 ; 8818,7975 9249,7975 ; 8818,7990 9324,7990 ; 8818,8005 9328,8005 ; 8818,8020 9343,8020 ; 8820,9505 v1(8820,9555) ; 8821,7900 9049,7900 ; 8823,7930 9201,7930 ; 8824,7855 8866,7855 ; 8825,7915 9199,7915 ; 8827,7750 8850,7750 ; 8830,7765 8846,7765 ; 8830,7780 8841,7780 ; 8830,7795 8837,7795 ; 8830,7810 8838,7810 ; 8830,7825 8842,7825 ; 8830,7840 8851,7840 ; 8850,7600 8691,7600 ; 8856,9079 9331,9079 ; 8857,9094 9331,9094 ; 8860,8494 8921,8494 ; 8863,9109 9331,9109 ; 8863,9124 9331,9124 ; 8863,9139 9331,9139 ; 8863,9154 9331,9154 ; 8863,9169 9331,9169 ; 8863,9184 9331,9184 ; 8863,9199 9331,9199 ; 8863,9214 9331,9214 ; 8863,9229 9331,9229 ; 8863,9244 9114,9244 ; 8863,9259 8899,9259 ; 8863,9274 8884,9274 ; 8863,9289 8880,9289 ; 8863,9304 8881,9304 ; 8863,9319 8887,9319 ; 8863,9334 8888,9334 ; 8863,9349 8888,9349 ; 8864,8659 8921,8659 ; 8865,9064 9331,9064 ; 8866,9364 8888,9364 ; 8870,9379 8888,9379 ; 8871,9394 8888,9394 ; 8873,9409 8888,9409 ; 8873,9424 8874,9424 ; 8879,8674 8921,8674 ; 8880,9049 9331,9049 ; 8882,8479 8921,8479 ; 8884,8509 8921,8509 ; 8885,8035 8912,8035 ; 8888,8389 8921,8389 ; 8888,8404 8921,8404 ; 8888,8419 8921,8419 ; 8892,8434 8921,8434 ; 8892,8464 8921,8464 ; 8893,8689 8921,8689 ; 8893,9034 9331,9034 ; 8896,8449 8921,8449 ; 8899,8524 8921,8524 ; 8899,8704 8921,8704 ; 8900,9019 9331,9019 ; 8902,8644 8921,8644 ; 8903,8719 8921,8719 ; 8903,8734 8921,8734 ; 8903,8764 8921,8764 ; 8903,8779 8921,8779 ; 8903,8794 8916,8794 ; 8903,8809 8914,8809 ; 8903,8824 8918,8824 ; 8903,8839 8932,8839 ; 8903,8854 9331,8854 ; 8903,8869 9331,8869 ; 8903,8884 9331,8884 ; 8903,8899 9331,8899 ; 8903,8914 9331,8914 ; 8903,8929 9331,8929 ; 8903,8944 9331,8944 ; 8903,8959 9331,8959 ; 8903,8974 9331,8974 ; 8903,8989 9331,8989 ; 8903,9004 9331,9004 ; 8905,8749 8921,8749 ; 8907,8539 8921,8539 ; 8912,8629 8921,8629 ; 8913,8554 8921,8554 ; 8913,8569 8921,8569 ; 8913,8584 8921,8584 ; 8913,8599 8921,8599 ; 8916,8614 8921,8614 ; v1(8925,6859) 8925,6910 8925,6914 ; 8932,9619 9007,9619 ; 8932,9634 8995,9634 ; 8932,9649 8989,9649 ; 8937,7465 9011,7465 ; 8939,7855 8989,7855 ; 8943,7480 9011,7480 ; 8944,9604 9022,9604 ; 8946,9664 8987,9664 ; 8949,7510 9011,7510 ; 8949,7525 9011,7525 ; 8949,7540 9011,7540 ; 8949,7555 9011,7555 ; 8949,7570 9011,7570 ; 8949,7585 9011,7585 ; 8949,7600 9015,7600 ; 8949,7615 9021,7615 ; 8949,7630 9034,7630 ; 8949,7645 9041,7645 ; 8949,7660 9041,7660 ; 8949,7675 9041,7675 ; 8949,7690 9040,7690 ; 8949,7705 9039,7705 ; 8949,7720 9039,7720 ; 8949,7735 9039,7735 ; 8949,7750 9039,7750 ; 8952,9739 8970,9739 ; 8953,9589 9018,9589 ; 8954,7840 8991,7840 ; 8955,9319 9106,9319 ; 8955,9334 9106,9334 ; 8955,9349 9016,9349 ; 8955,9364 9007,9364 ; 8955,9379 9001,9379 ; 8955,9394 8988,9394 ; 8955,9409 8986,9409 ; 8955,9679 8970,9679 ; 8956,9694 8968,9694 ; 8956,9709 8968,9709 ; 8956,9724 8968,9724 ; 8958,9304 9106,9304 ; 8959,7765 9041,7765 ; 8959,9289 9102,9289 ; 8959,9514 8986,9514 ; 8959,9529 8988,9529 ; 8959,9544 8998,9544 ; 8959,9559 9000,9559 ; 8959,9574 9004,9574 ; 8963,7825 8998,7825 ; 8964,7780 9058,7780 ; 8967,7810 9024,7810 ; 8968,7795 9058,7795 ; 8969,9424 8986,9424 ; 8971,9499 8986,9499 ; 8975,9439 8986,9439 ; 8975,9454 8988,9454 ; 8975,9469 8988,9469 ; 8975,9484 8986,9484 ; 8977,8839 9331,8839 ; 8985,8035 9012,8035 ; 8988,8389 9016,8389 ; 8988,8404 9016,8404 ; 8988,8419 9016,8419 ; 8988,8434 9016,8434 ; 8988,8449 v1@9016,8449 ; 8988,8464 9016,8464 ; 8988,8479 9016,8479 ; 8988,8494 9016,8494 ; 8988,8509 9016,8509 ; 8988,8524 9016,8524 ; 8988,8539 9016,8539 ; 8988,8554 9016,8554 ; 8988,8569 9011,8569 ; 8988,8584 9009,8584 ; 8988,8599 9013,8599 ; 8988,8614 9027,8614 ; 8988,8629 9331,8629 ; 8988,8644 9331,8644 ; 8988,8659 9331,8659 ; 8988,8674 9331,8674 ; 8988,8689 9331,8689 ; 8988,8704 9331,8704 ; 8988,8719 9331,8719 ; 8988,8734 9331,8734 ; 8988,8749 9331,8749 ; 8988,8764 9331,8764 ; 8988,8779 9331,8779 ; 8991,8824 9331,8824 ; 8993,8794 9331,8794 ; 8995,8809 9331,8809 ; 9011,7495 8949,7495 ; 9035,7810 9041,7810 ; 9040,9504 v1(9040,9554) ; v1@9045,9374 9045,9424 ; 9050,7215 9050,7315 ; 9050,7396 9050,7400 v1(9050,7451) ; v1@9050,7455 9050,7590 9080,7620 9080,7725 ; 9072,8614 9331,8614 ; 9073,9349 9106,9349 ; 9082,9364 9106,9364 ; 9083,8389 9113,8389 ; 9083,8404 9116,8404 ; 9083,8419 9116,8419 ; 9083,8434 v1@9116,8434 ; 9083,8449 9116,8449 ; 9083,8464 9116,8464 ; 9083,8479 9116,8479 ; 9083,8494 9116,8494 ; 9083,8509 9116,8509 ; 9083,8524 9116,8524 ; 9083,8539 9114,8539 ; 9083,8554 9110,8554 ; 9085,8035 9112,8035 ; 9086,8599 9141,8599 ; 9088,8569 9111,8569 ; 9090,8584 9117,8584 ; 9091,9394 9106,9394 ; 9093,9409 9106,9409 ; 9098,9274 8955,9274 ; 9102,9259 8940,9259 ; 9106,9379 9086,9379 ; 9113,7780 9127,7780 ; 9113,7795 9127,7795 ; 9122,7900 9128,7900 ; 9150,9710 9150,9640 9195,9595 9195,9450 9220,9425 9240,9425 ; 9158,8599 9331,8599 ; 9165,9244 9331,9244 ; 9173,9304 9331,9304 ; 9173,9319 9331,9319 ; 9173,9334 9331,9334 ; 9173,9349 9226,9349 ; 9173,9364 9217,9364 ; 9173,9379 9213,9379 ; 9173,9394 9198,9394 ; 9173,9409 9180,9409 ; v1(9175,6859) 9175,6910 9175,6914 ; 9177,9259 9331,9259 ; 9177,9289 9331,9289 ; 9181,9274 9331,9274 ; 9182,8584 9331,8584 ; 9183,8404 9331,8404 ; 9183,8419 9331,8419 ; 9183,8434 9331,8434 ; 9183,8449 9331,8449 ; 9183,8464 9331,8464 ; 9183,8479 9331,8479 ; 9183,8494 9331,8494 ; 9183,8509 9331,8509 ; 9183,8524 9331,8524 ; 9185,8035 9212,8035 ; 9186,8389 v1@9331,8389 ; 9187,8164 9214,8164 ; 9187,8179 9615,8179 ; 9187,8194 9614,8194 ; 9187,8209 9614,8209 ; 9188,8569 9331,8569 ; 9189,8554 9331,8554 ; 9196,8224 9339,8224 ; 9201,7900 9203,7900 ; 9202,7780 9239,7780 ; 9202,7795 9236,7795 ; 9202,8299 9331,8299 ; 9204,8314 9331,8314 ; 9204,8374 9331,8374 ; 9205,8239 9327,8239 ; 9206,8254 9323,8254 ; 9206,8269 9327,8269 ; 9206,8284 9331,8284 ; 9206,8329 9331,8329 ; 9206,8344 9331,8344 ; 9206,8359 9331,8359 ; 9209,7765 9224,7765 ; 9209,7810 9236,7810 ; 9210,7885 9218,7885 ; 9211,7825 9236,7825 ; 9211,7840 9236,7840 ; 9211,7855 9244,7855 ; 9211,7870 9251,7870 ; v1(9235,7725) 9250,7735 9260,7740 9295,7740 9295,7660 ; v1(9240,7920) 9275,7920 9290,7920 ; 9250,9505 v1(9250,9555) ; v1@9255,9375 9255,9425 ; 9283,9349 9331,9349 ; 9284,8164 9314,8164 ; 9285,8035 9312,8035 ; 9290,7810 9290,7815 9290,7920 ; 9290,7940 9290,7920 ; 9292,9364 9331,9364 ; 9301,9394 9331,9394 ; 9303,9409 9331,9409 ; 9303,9424 9304,9424 ; v1(9305,7075) 9305,7135 ; 9322,7975 9326,7975 ; 9331,8539 9185,8539 ; 9331,9379 9296,9379 ; 9380,6935 9575,6935 ; 9380,7010 v1(9425,7010) 9440,7025 9475,7025 ; 9384,8164 9414,8164 ; 9385,8035 9412,8035 ; 9386,8020 9589,8020 ; 9390,8224 9614,8224 ; 9398,8284 9614,8284 ; 9398,8299 9614,8299 ; 9398,8314 9614,8314 ; 9398,8329 9614,8329 ; 9398,8344 9614,8344 ; 9398,8359 9614,8359 ; 9398,8374 9613,8374 ; 9398,8389 v1@9613,8389 ; 9398,8404 v1@9613,8404 ; 9398,8419 9613,8419 ; 9398,8434 9613,8434 ; 9398,8449 9613,8449 ; 9398,8464 9613,8464 ; 9398,8479 9613,8479 ; 9398,8494 9613,8494 ; 9398,8509 9613,8509 ; 9398,8524 9613,8524 ; 9398,8539 9613,8539 ; 9398,8554 9612,8554 ; 9398,8569 9612,8569 ; 9398,8584 9612,8584 ; 9398,8599 9612,8599 ; 9398,8614 9612,8614 ; 9398,8629 9612,8629 ; 9398,8644 9612,8644 ; 9398,8659 9612,8659 ; 9398,8674 9612,8674 ; 9398,8689 9612,8689 ; 9398,8704 9612,8704 ; 9398,8719 9612,8719 ; 9398,8734 9612,8734 ; 9398,8749 9611,8749 ; 9398,8764 9611,8764 ; 9398,8779 9611,8779 ; 9398,8794 9611,8794 ; 9398,8809 9611,8809 ; 9398,8824 9607,8824 ; 9398,8839 9603,8839 ; 9398,8854 9607,8854 ; 9398,8869 9617,8869 ; 9398,8884 10000,8884 ; 9398,8899 10000,8899 ; 9398,8914 10000,8914 ; 9398,8929 10000,8929 ; 9398,8944 10000,8944 ; 9398,8959 10000,8959 ; 9398,8974 10000,8974 ; 9398,8989 10000,8989 ; 9398,9004 10000,9004 ; 9398,9019 10000,9019 ; 9398,9034 10000,9034 ; 9398,9049 10000,9049 ; 9398,9064 10000,9064 ; 9398,9079 10000,9079 ; 9398,9094 10000,9094 ; 9398,9109 10000,9109 ; 9398,9124 10000,9124 ; 9398,9139 10000,9139 ; 9398,9154 10000,9154 ; 9398,9169 10000,9169 ; 9398,9184 10000,9184 ; 9398,9199 10000,9199 ; 9398,9214 10000,9214 ; 9398,9229 10000,9229 ; 9398,9244 10000,9244 ; 9398,9259 10000,9259 ; 9398,9274 10000,9274 ; 9398,9289 10000,9289 ; 9398,9304 10000,9304 ; 9398,9319 10000,9319 ; 9398,9334 10000,9334 ; 9398,9349 9426,9349 ; 9398,9364 9417,9364 ; 9398,9379 9413,9379 ; 9401,8005 9563,8005 ; 9402,7870 9490,7870 ; 9402,8239 9614,8239 ; 9402,8269 9614,8269 ; 9403,7975 9554,7975 ; v1(9405,7075) 9405,7135 ; 9405,7990 9556,7990 ; 9406,8254 9614,8254 ; 9409,7885 9561,7885 ; 9410,7960 9558,7960 ; 9411,7900 9561,7900 ; 9411,7915 9561,7915 ; 9411,7930 9561,7930 ; 9411,7945 9561,7945 ; 9413,7855 9475,7855 ; 9421,7840 9471,7840 ; 9434,7720 9526,7720 ; 9434,7735 9526,7735 ; 9440,7705 9526,7705 ; 9442,7690 9526,7690 ; 9443,7810 9471,7810 ; 9444,7750 9530,7750 ; 9445,7765 9537,7765 ; 9445,7780 9490,7780 ; 9445,7795 9475,7795 ; 9447,7465 9526,7465 ; 9447,7480 9526,7480 ; 9447,7495 9526,7495 ; 9447,7510 9526,7510 ; 9450,7525 9526,7525 ; 9450,9504 v1(9450,9554) ; v1@9455,9374 9455,9424 ; 9457,7600 9526,7600 ; 9459,7615 9526,7615 ; 9459,7675 9526,7675 ; 9460,7540 9526,7540 ; 9461,7555 9526,7555 ; 9461,7570 9526,7570 ; 9461,7585 9526,7585 ; 9461,7630 9526,7630 ; 9461,7645 9526,7645 ; 9461,7660 9526,7660 ; 9483,9349 9646,9349 ; 9484,8164 9514,8164 ; 9485,8035 9512,8035 ; 9492,9364 9637,9364 ; 9496,9379 9633,9379 ; 9501,9394 9618,9394 ; 9503,9409 9610,9409 ; 9503,9424 9504,9424 ; 9559,7870 9561,7870 ; 9584,8164 9614,8164 ; 9585,8035 9612,8035 ; 9593,7585 9651,7585 ; 9593,7600 9651,7600 ; 9593,7615 9648,7615 ; 9593,7630 9644,7630 ; 9593,7645 9646,7645 ; 9593,7660 9653,7660 ; 9593,7675 9679,7675 ; 9593,7690 9680,7690 ; 9593,7705 9672,7705 ; 9593,7720 9668,7720 ; 9600,8020 9696,8020 ; 9602,7735 9669,7735 ; 9610,7300 9620,7290 9620,7195 ; 9617,7750 9673,7750 ; 9624,7765 9685,7765 ; 9626,8005 9696,8005 ; 9628,7780 9713,7780 ; 9628,7795 9761,7795 ; 9628,7810 9768,7810 ; 9628,7825 9766,7825 ; 9628,7840 9764,7840 ; 9628,7855 9767,7855 ; 9628,7870 9713,7870 ; 9628,7885 9685,7885 ; 9628,7900 9673,7900 ; 9628,7915 9669,7915 ; 9628,7930 9668,7930 ; 9628,7945 9672,7945 ; 9631,7960 9680,7960 ; 9633,7990 9696,7990 ; 9635,7975 9695,7975 ; 9637,7570 9651,7570 ; 9650,9715 9650,9660 9620,9630 9620,9455 9660,9415 ; 9670,6650 9670,6745 ; 9670,9504 v1(9670,9554) ; 9672,8869 10000,8869 ; 9675,6650 9720,6605 9720,6450 ; v1@9675,9374 9675,9424 ; 9678,8764 10000,8764 ; 9678,8779 10000,8779 ; 9678,8794 10000,8794 ; 9678,8809 10000,8809 ; 9679,8584 9815,8584 ; 9679,8599 9823,8599 ; 9679,8614 9826,8614 ; 9679,8629 9824,8629 ; 9679,8644 9820,8644 ; 9679,8659 9821,8659 ; 9679,8674 9827,8674 ; 9679,8689 9851,8689 ; 9679,8704 10000,8704 ; 9679,8719 10000,8719 ; 9679,8734 10000,8734 ; 9679,8749 10000,8749 ; v1@9680,8389 9914,8389 ; v1@9680,8404 9902,8404 ; 9680,8419 9898,8419 ; 9680,8434 9902,8434 ; 9680,8449 9906,8449 ; 9680,8464 9906,8464 ; 9680,8479 9906,8479 ; 9680,8494 9836,8494 ; 9680,8509 9816,8509 ; 9680,8524 9814,8524 ; 9680,8539 9814,8539 ; 9680,8554 9814,8554 ; 9680,8569 9814,8569 ; 9681,8209 9981,8209 ; 9681,8224 9974,8224 ; 9681,8239 9974,8239 ; 9681,8254 9974,8254 ; 9681,8269 9974,8269 ; 9681,8284 9974,8284 ; 9681,8299 9974,8299 ; 9681,8314 9974,8314 ; 9681,8329 9974,8329 ; 9681,8344 9974,8344 ; 9681,8359 9974,8359 ; 9681,8374 9974,8374 ; 9682,8179 9999,8179 ; 9682,8194 9999,8194 ; 9682,8824 10000,8824 ; 9682,8854 10000,8854 ; 9684,8164 9714,8164 ; 9685,8035 9696,8035 ; 9686,8839 10000,8839 ; 9690,7675 9695,7675 ; 9695,8010 9755,8070 ; 9703,9349 10000,9349 ; 9712,9364 10000,9364 ; 9716,7660 9733,7660 ; 9716,9379 10000,9379 ; 9718,7570 9733,7570 ; 9718,7585 9733,7585 ; 9718,7600 9733,7600 ; 9721,7615 9733,7615 ; 9721,9394 10000,9394 ; 9723,7645 9733,7645 ; 9723,9409 10000,9409 ; 9723,9424 9724,9424 ; 9725,7630 9733,7630 ; 9735,7935 9735,8095 9750,8110 ; 9736,7780 9759,7780 ; 9736,7870 9767,7870 ; v1(9755,9555) 9755,9710 ; v1(9760,6485) v1(9760,7010) ; 9764,7885 9767,7885 ; 9784,8164 9814,8164 ; 9816,7540 9959,7540 ; 9816,7555 9959,7555 ; 9816,7570 9959,7570 ; 9816,7585 9959,7585 ; 9816,7600 9959,7600 ; 9816,7615 9959,7615 ; 9816,7630 9959,7630 ; 9816,7645 9959,7645 ; 9816,7660 9959,7660 ; 9816,7675 9959,7675 ; 9823,7690 9959,7690 ; 9828,9499 10000,9499 ; 9838,7705 9959,7705 ; 9842,9514 10000,9514 ; 9844,7720 9959,7720 ; 9852,9484 10000,9484 ; 9854,9529 10000,9529 ; 9855,7005 9855,7010 9855,7105 9855,7235 ; 9858,9469 10000,9469 ; 9859,9454 10000,9454 ; 9860,9544 10000,9544 ; 9861,7525 9959,7525 ; 9862,9559 10000,9559 ; 9862,9574 10000,9574 ; 9862,9589 10000,9589 ; 9862,9604 10000,9604 ; 9862,9619 10000,9619 ; 9862,9634 10000,9634 ; 9862,9649 10000,9649 ; 9862,9664 10000,9664 ; 9862,9679 10000,9679 ; 9862,9694 10000,9694 ; 9862,9709 10000,9709 ; 9862,9724 10000,9724 ; 9862,9739 10000,9739 ; 9868,7735 9851,7735 ; 9868,8689 10000,8689 ; 9872,7480 9959,7480 ; 9872,7510 9959,7510 ; 9873,7465 9959,7465 ; 9884,8164 9914,8164 ; 9885,8494 9906,8494 ; 9892,8674 10000,8674 ; 9893,8614 9998,8614 ; 9898,8599 9902,8599 ; 9898,8659 10000,8659 ; 9899,8644 10000,8644 ; 9959,7495 9876,7495 ; 9965,8389 9975,8389 ; 9973,8449 10000,8449 ; 9973,8464 10000,8464 ; 9973,8479 10000,8479 ; 9973,8494 10000,8494 ; 9977,8404 9985,8404 ; 9977,8434 10000,8434 ; 9977,8599 9998,8599 ; 9981,8419 10000,8419 ; 9984,8164 9999,8164 ; 9984,8509 10000,8509 ; 9985,8584 9998,8584 ; 9986,8524 10000,8524 ; 9986,8539 9998,8539 ; 9986,8554 9998,8554 ; 9986,8569 9998,8569 ; 9998,8629 9895,8629 ; v1(10000,7075) 10000,7185 ; 10000,9424 9840,9424 ; 10000,9439 9855,9439 ; 10180,9406 10191,9406 ; 10180,9421 10196,9421 ; 10184,9391 10191,9391 ; 10185,9436 10199,9436 ; 10200,9451 10203,9451 ; 10207,9466 10215,9466 ; 10212,9646 10415,9646 ; 10212,9661 10415,9661 ; v1@10212,9676 10415,9676 ; v1@10212,9691 10422,9691 ; 10212,9706 10499,9706 ; 10212,9721 10412,9721 ; 10212,9736 10404,9736 ; 10222,9481 10276,9481 ; 10225,8926 10536,8926 ; 10225,8941 10536,8941 ; 10225,8956 10536,8956 ; 10225,8971 10536,8971 ; 10225,8986 10536,8986 ; 10225,9001 10536,9001 ; 10225,9016 10526,9016 ; 10226,9556 10274,9556 ; 10228,9631 10415,9631 ; 10229,9031 10515,9031 ; 10229,9571 10278,9571 ; 10230,9496 10276,9496 ; 10231,9511 10276,9511 ; 10231,9526 10276,9526 ; 10231,9586 10290,9586 ; 10231,9601 10415,9601 ; 10231,9616 10415,9616 ; 10240,8750 10275,8715 v1(10275,8710) ; 10240,9385 v1(10240,9435) ; 10244,9046 10513,9046 ; 10245,8605 v1(10310,8605) ; 10245,8835 v1(10245,8885) ; 10259,9061 10513,9061 ; 10260,9310 10270,9310 10310,9350 10315,9355 10315,9365 v1(10315,9450) v1(10315,9555) ; 10264,9466 10276,9466 ; 10274,8911 10435,8911 ; 10274,9076 10513,9076 ; 10276,9541 10231,9541 ; 10283,8896 10426,8896 ; 10283,9091 10516,9091 ; 10285,8881 10424,8881 ; 10289,9106 10516,9106 ; 10295,9121 10513,9121 ; 10295,9136 10513,9136 ; 10295,9151 10513,9151 ; 10295,9166 10515,9166 ; 10295,9181 10525,9181 ; 10295,9196 10862,9196 ; 10295,9211 10859,9211 ; 10295,9226 10859,9226 ; 10295,9241 10859,9241 ; 10295,9256 10859,9256 ; 10295,9271 10859,9271 ; 10296,8866 10413,8866 ; 10298,8836 10300,8836 ; 10298,8851 10411,8851 ; 10301,9286 10863,9286 ; 10321,9301 10853,9301 ; 10339,9586 10415,9586 ; 10343,9316 10851,9316 ; 10349,9331 10754,9331 ; 10351,9346 10418,9346 ; 10351,9571 10415,9571 ; 10353,9376 10415,9376 ; 10353,9391 10415,9391 ; 10353,9406 10415,9406 ; 10353,9421 10415,9421 ; 10353,9436 10415,9436 ; 10353,9466 10415,9466 ; 10353,9481 10415,9481 ; 10353,9496 10415,9496 ; 10353,9511 10415,9511 ; 10353,9526 10415,9526 ; 10353,9541 10415,9541 ; 10354,9361 10415,9361 ; 10355,9451 10415,9451 ; 10355,9556 10415,9556 ; 10380,8746 10411,8746 ; 10393,8836 10411,8836 ; 10395,8731 10413,8731 ; 10395,8761 10411,8761 ; 10400,8776 10411,8776 ; 10400,8791 10413,8791 ; 10400,8806 10412,8806 ; 10400,8821 10411,8821 ; 10410,8716 10423,8716 ; v1(10465,8710) 10465,8760 ; 10465,8830 10465,8835 v1(10465,8885) ; 10494,8911 10536,8911 ; 10500,7880 v1(10500,8315) ; 10503,8896 10536,8896 ; 10505,8881 10536,8881 ; 10516,8866 10533,8866 ; 10518,8836 10519,8836 ; 10518,8851 10529,8851 ; 10560,7785 10560,7530 10595,7495 v1(10595,7235) ; 10610,9706 10719,9706 ; 10614,9181 10650,9181 ; v1(10695,8885) 10695,9060 ; 10697,9691 10734,9691 ; 10704,9361 10749,9361 ; 10704,9376 10749,9376 ; 10704,9391 10749,9391 ; 10704,9406 10756,9406 ; 10704,9421 10765,9421 ; 10704,9436 10765,9436 ; 10704,9451 10765,9451 ; 10704,9466 10760,9466 ; 10704,9481 10745,9481 ; 10704,9496 10743,9496 ; 10704,9511 10743,9511 ; 10704,9526 10743,9526 ; 10704,9541 10745,9541 ; 10704,9556 10746,9556 ; 10704,9571 10743,9571 ; 10704,9586 10743,9586 ; 10704,9601 10743,9601 ; 10704,9616 10744,9616 ; 10704,9631 10754,9631 ; 10704,9646 10762,9646 ; 10704,9661 10760,9661 ; 10704,9676 10745,9676 ; 10739,9181 10755,9181 ; 10749,9346 10701,9346 ; 10755,8028 11175,8028 ; 10760,8613 11136,8613 ; 10768,8628 11136,8628 ; 10770,8043 11181,8043 ; 10773,8643 11136,8643 ; 10773,8658 11136,8658 ; 10773,8673 11136,8673 ; 10773,8688 11136,8688 ; 10773,8703 11136,8703 ; 10773,8718 11136,8718 ; 10773,8733 11136,8733 ; 10773,8748 11136,8748 ; 10778,8013 11175,8013 ; 10781,8058 11181,8058 ; 10783,7788 10798,7788 ; 10783,7803 10833,7803 ; 10783,7938 10791,7938 ; 10783,7953 11273,7953 ; 10783,8763 11136,8763 ; 10785,8838 11136,8838 ; 10786,7968 11273,7968 ; 10786,8778 11136,8778 ; 10786,8793 11136,8793 ; 10786,8808 11136,8808 ; 10786,8823 11136,8823 ; 10787,7998 11179,7998 ; 10787,8073 11181,8073 ; 10787,8088 11181,8088 ; 10787,8103 11181,8103 ; 10787,8118 11181,8118 ; 10787,8133 11181,8133 ; 10787,8148 11181,8148 ; 10787,8163 11181,8163 ; 10787,8178 11139,8178 ; 10787,8193 11131,8193 ; 10787,8208 11129,8208 ; 10787,8223 11133,8223 ; 10787,8238 11136,8238 ; 10787,8253 11136,8253 ; 10787,8268 11136,8268 ; 10787,8283 11136,8283 ; 10787,8298 11136,8298 ; 10787,8313 11136,8313 ; 10787,8328 11136,8328 ; 10787,8343 11136,8343 ; 10787,8358 11136,8358 ; 10787,8373 11136,8373 ; 10787,8388 11136,8388 ; 10787,8403 11136,8403 ; 10787,8418 11136,8418 ; 10787,8433 11136,8433 ; 10787,8448 11136,8448 ; 10787,8463 11136,8463 ; 10787,8478 11136,8478 ; 10787,8493 11136,8493 ; 10791,7983 11196,7983 ; 10792,8598 11136,8598 ; 10795,9790 v1(10795,9885) ; 10797,8508 11136,8508 ; 10799,8583 11136,8583 ; 10800,8523 11136,8523 ; 10800,8538 11136,8538 ; 10800,8553 11136,8553 ; 10800,8568 11136,8568 ; v1(10800,8885) 10800,9060 ; 10825,8853 11136,8853 ; 10836,8868 11136,8868 ; 10838,8898 11136,8898 ; 10838,8913 11136,8913 ; 10838,8928 11136,8928 ; 10838,8943 11136,8943 ; 10838,8958 11136,8958 ; 10838,8973 11136,8973 ; 10838,8988 11136,8988 ; 10838,9003 11136,9003 ; 10838,9018 11136,9018 ; 10841,8883 11136,8883 ; 10844,9181 10864,9181 ; 10846,7803 10899,7803 ; 10851,9033 11136,9033 ; 10852,9166 10864,9166 ; 10853,9048 11136,9048 ; 10853,9063 10855,9063 ; 10853,9151 10864,9151 ; 10881,7788 10889,7788 ; 10888,7938 11273,7938 ; 10898,7818 10913,7818 ; 10903,7923 11256,7923 ; 10905,7833 10926,7833 ; 10905,7848 10940,7848 ; 10905,7863 10964,7863 ; 10905,7878 11031,7878 ; 10905,7893 11046,7893 ; 10905,7908 11249,7908 ; 10905,9405 v1@10905,9445 ; v1(10905,9840) v1(10905,9450) ; 10940,9153 11136,9153 ; 10940,9168 11136,9168 ; 10940,9183 10963,9183 ; 10948,9063 11136,9063 ; 10955,9078 11136,9078 ; 10955,9093 11136,9093 ; 10955,9108 11136,9108 ; 10955,9123 11136,9123 ; 10985,9250 v1(10985,9885) ; 11006,7465 11033,7465 ; 11006,7480 11028,7480 ; 11006,7495 11028,7495 ; 11006,7510 11028,7510 ; 11006,7525 11028,7525 ; 11006,7540 11028,7540 ; 11006,7555 11028,7555 ; 11006,9183 11136,9183 ; 11023,9288 11136,9288 ; 11023,9303 11136,9303 ; 11023,9318 11136,9318 ; 11023,9333 11136,9333 ; 11023,9348 11136,9348 ; 11023,9363 11136,9363 ; 11023,9378 11136,9378 ; 11023,9393 11136,9393 ; 11023,9408 11136,9408 ; 11023,9423 11136,9423 ; 11023,9438 11136,9438 ; 11023,9453 11136,9453 ; 11023,9468 11136,9468 ; 11023,9483 11136,9483 ; 11023,9498 11136,9498 ; 11023,9513 11136,9513 ; 11023,9528 11136,9528 ; 11023,9543 11136,9543 ; 11023,9558 11136,9558 ; 11023,9573 11136,9573 ; 11023,9588 11136,9588 ; 11023,9603 11136,9603 ; 11023,9618 11136,9618 ; 11023,9633 11136,9633 ; 11023,9648 11136,9648 ; 11023,9663 11136,9663 ; 11023,9678 11136,9678 ; 11023,9693 11136,9693 ; 11023,9708 11136,9708 ; 11023,9723 11139,9723 ; 11023,9738 11146,9738 ; 11028,9198 11136,9198 ; 11030,9273 11136,9273 ; 11031,9213 11136,9213 ; 11031,9228 11136,9228 ; 11031,9243 11136,9243 ; 11031,9258 11136,9258 ; 11136,9138 10952,9138 ; 11213,7893 11249,7893 ; 11226,7465 11599,7465 ; 11228,7878 11249,7878 ; 11231,7495 11599,7495 ; 11231,7510 11598,7510 ; 11233,7983 11273,7983 ; 11238,7525 11598,7525 ; 11248,8058 11273,8058 ; 11248,8073 11273,8073 ; 11248,8088 11273,8088 ; 11248,8103 11273,8103 ; 11248,8118 11273,8118 ; 11248,8133 11273,8133 ; 11248,8148 11273,8148 ; 11248,8163 11273,8163 ; 11248,8178 11273,8178 ; 11248,8193 11273,8193 ; 11248,8208 11273,8208 ; v1@11248,8223 11273,8223 ; v1@11248,8238 11273,8238 ; 11248,8253 11277,8253 ; 11248,8268 11283,8268 ; 11248,8283 11289,8283 ; 11248,8298 11300,8298 ; 11248,8313 11315,8313 ; 11248,8328 11330,8328 ; 11248,8343 11345,8343 ; 11248,8358 11360,8358 ; 11248,8373 11375,8373 ; 11248,8388 11390,8388 ; 11248,8403 11405,8403 ; 11248,8418 11420,8418 ; 11248,8433 11279,8433 ; 11248,8448 11268,8448 ; 11248,8463 11263,8463 ; 11248,8478 11267,8478 ; 11248,8493 11271,8493 ; 11250,7998 11273,7998 ; 11253,7540 11598,7540 ; 11254,8013 11273,8013 ; 11254,8028 11273,8028 ; 11268,7555 11597,7555 ; 11273,8043 11248,8043 ; 11330,8433 11451,8433 ; 11338,8493 11576,8493 ; 11338,8508 11576,8508 ; 11338,8523 11576,8523 ; 11338,8538 11576,8538 ; 11338,8553 11576,8553 ; 11338,8568 11575,8568 ; 11338,8583 11573,8583 ; 11338,8598 11575,8598 ; 11338,8613 11574,8613 ; 11338,8628 11574,8628 ; 11338,8643 11574,8643 ; 11338,8658 11573,8658 ; 11338,8673 11573,8673 ; 11338,8688 11573,8688 ; 11338,8703 11572,8703 ; 11338,8718 11572,8718 ; 11338,8733 11572,8733 ; 11338,8748 11571,8748 ; 11338,8763 11571,8763 ; 11338,8778 11571,8778 ; 11338,8793 11570,8793 ; 11338,8808 11570,8808 ; 11338,8823 11570,8823 ; 11338,8838 11569,8838 ; 11338,8853 11569,8853 ; 11338,8868 11569,8868 ; 11338,8883 11568,8883 ; 11338,8898 11568,8898 ; 11338,8913 11568,8913 ; 11338,8928 11567,8928 ; 11338,8943 11567,8943 ; 11338,8958 11567,8958 ; 11338,8973 11566,8973 ; 11338,8988 11566,8988 ; 11338,9003 11566,9003 ; 11338,9018 11565,9018 ; 11338,9033 11565,9033 ; 11338,9048 11565,9048 ; 11338,9063 11564,9063 ; 11338,9078 11564,9078 ; 11338,9093 11564,9093 ; 11338,9108 11563,9108 ; 11338,9123 11563,9123 ; 11338,9138 11563,9138 ; 11338,9153 11562,9153 ; 11338,9168 11562,9168 ; 11338,9183 11562,9183 ; 11338,9198 11561,9198 ; 11338,9213 11561,9213 ; 11338,9228 11561,9228 ; 11338,9243 11561,9243 ; 11338,9258 11560,9258 ; 11338,9273 11560,9273 ; 11338,9288 11560,9288 ; 11338,9303 11559,9303 ; 11338,9318 11559,9318 ; v1@11338,9333 11538,9333 ; 11338,9348 11523,9348 ; 11338,9363 11508,9363 ; 11338,9378 11493,9378 ; 11338,9393 11478,9393 ; 11338,9408 11463,9408 ; 11338,9423 11448,9423 ; 11338,9438 11433,9438 ; 11338,9453 11418,9453 ; 11338,9468 11403,9468 ; 11338,9483 11388,9483 ; 11338,9498 11373,9498 ; 11338,9513 11358,9513 ; 11338,9528 11343,9528 ; 11341,8448 11576,8448 ; 11342,8478 11576,8478 ; 11346,8463 11576,8463 ; 11395,7200 v1(11395,7295) ; 11485,9800 v1(11485,9840) ; 11565,10185 11570,10185 ; 11575,10195 11575,10220 11625,10270 11675,10270 ; 11599,7480 11231,7480 ; 11605,9890 11605,9900 11630,9925 11630,9975 v1(11625,9980) ; 11615,8370 v1(11615,8585) ; 11655,9795 11655,9805 v1(11655,9840) ; 11740,10190 11745,10195 ; 11745,10180 11745,10205 11815,10275 11830,10275 ; 11785,9880 11790,9885 v1(11790,9980) ; v1(11875,9875) 11875,9905 11925,9955 ; v1(11970,9720) 11970,9815 ; v1(12080,9405) v1(12080,9980) ; 12170,10060 12170,10275 ; 12175,9965 12205,9935 12205,9665 ; 12270,8565 12270,9165 12335,9165 ; 12270,9150 v1(12270,9370) ; v1(12295,7365) 12360,7365 ; 12295,9715 12295,9800 12410,9800 12430,9820 12430,9955 ; 12305,9875 v1(12365,9875) ; 12345,7955 12270,7955 ; 12350,7360 12295,7360 12270,7385 12270,7955 ; 12350,8560 12270,8560 12270,7955 ; 12350,9170 12505,9170 ; 12375,7955 12430,7955 12465,7990 12505,7990 ; 12495,7685 12535,7685 12575,7725 12575,8210 12605,8240 12605,8305 12575,8335 12575,8510 12610,8545 12610,8610 12575,8645 12575,9050 12595,9070 12595,9245 v1(12600,9250) ; 12505,8585 v1(12570,8585) ; 12510,8280 v1(12570,8280) ; 12637,7800 12637,8047 12637,8100 12637,8383 12637,8400 12630,8420 12650,8440 12650,8640 12637,8653 12637,8657 12637,8700 ; 12645,7490 12645,7590 12715,7660 12715,9005 v1(12730,9020) ; v1(12675,9715) 12675,9830 v1(12675,9880) ; 4738,8724 4944,8724 ; 4738,8724 4944,8724 ; 4738,8724 4731,8731 4729,8731 4729,8788 4734,8783 4748,8780 4812,8780 4825,8783 4835,8793 4838,8807 4838,8826 4850,8823 4870,8829 ; 4870,8829 4885,8844 ; 4885,8844 5155,8844 ; 4885,8844 4891,8865 4885,8885 4884,8887 4893,8891 4963,8961 4973,8985 4973,9086 4975,9089 4981,9110 4975,9130 4960,9145 4942,9150 4945,9150 4976,9163 4976,9164 5045,9164 5051,9165 5123,9093 5155,9080 5156,9080 5156,8925 5155,8925 5152,8912 5152,8858 5155,8844 ; 4944,8724 4951,8731 4965,8734 5045,8734 5058,8731 5065,8724 ; 5065,8724 5156,8724 ; 5065,8724 5156,8724 ; 5155,8844 5156,8844 5156,8724 ; 5286,9551 5290,9540 5299,9520 5299,9441 5308,9432 5311,9419 5311,9379 5308,9365 5302,9359 5308,9353 5308,9352 5328,9343 5353,9318 5363,9295 5363,9118 5381,9101 5381,9600 5378,9610 5384,9630 5392,9638 5381,9641 5371,9651 5368,9665 5368,9705 5371,9718 5377,9724 5371,9730 5368,9744 5368,9750 5361,9750 5361,9744 5358,9730 5352,9724 5358,9718 5361,9705 5361,9665 5358,9651 5348,9641 5335,9638 5275,9638 5261,9641 5253,9639 5253,9563 5255,9564 5275,9555 5286,9551 ; 5483,9476 5483,9562 5486,9575 5496,9585 5510,9588 5540,9588 5550,9586 5560,9588 5583,9588 5583,9674 5586,9687 5589,9689 5583,9710 5589,9730 5591,9733 5591,9750 5481,9750 5481,9744 5478,9730 5472,9724 5480,9726 5500,9720 5515,9705 5521,9685 5515,9664 5500,9649 5480,9643 5472,9645 5468,9641 5455,9638 5448,9638 5455,9630 5461,9610 5458,9600 5458,8906 5462,8906 5529,8906 5580,8958 5580,9095 5593,9126 5641,9174 5636,9176 ; 5483,9476 5486,9464 5486,9454 5483,9445 5489,9424 5504,9409 5525,9403 5545,9409 5560,9424 5566,9445 5565,9449 5590,9449 5600,9451 5610,9449 5640,9449 5650,9451 5660,9449 5684,9449 5683,9445 5686,9435 5686,9368 5660,9368 5650,9366 5640,9368 5610,9368 5600,9366 5590,9368 5560,9368 5550,9366 5540,9368 5510,9368 5496,9365 5486,9355 5483,9342 5483,9256 5486,9242 5496,9232 5510,9229 5533,9229 5539,9209 5554,9194 5575,9188 5595,9194 5607,9205 5636,9176 ; 5666,9710 5663,9700 5690,9700 5700,9698 5710,9700 5740,9700 5750,9698 5760,9700 5790,9700 5800,9698 5810,9700 5840,9700 5850,9698 5860,9700 5890,9700 5900,9698 5910,9700 5940,9700 5950,9698 5960,9700 5990,9700 6003,9697 6013,9687 6016,9674 6016,9630 6019,9625 6019,9530 6027,9561 6052,9586 6086,9595 6119,9586 6141,9564 6141,9676 6139,9679 6133,9700 6139,9720 6142,9723 6056,9723 6042,9727 6032,9737 6029,9750 5716,9750 5710,9729 5695,9714 5675,9708 5666,9710 ; 5697,8700 5740,8743 5756,8743 5756,8349 5753,8340 ; 5697,8700 5750,8700 5750,7907 5803,7853 5813,7830 ; 5753,8340 5759,8319 5774,8304 5795,8298 5815,8304 5830,8319 5836,8340 ; 5813,7800 5861,7800 ; 5813,7800 5861,7800 ; 5813,7800 5813,7830 ; 5836,8340 5833,8349 5833,8354 5839,8349 5860,8343 5861,8343 5861,7800 ; 6032,7800 6039,7800 ; 6032,7800 6039,7800 ; 6032,7800 6031,7887 6045,7883 6065,7889 6080,7904 6086,7925 6080,7945 6078,7948 6078,8409 6079,8409 6100,8400 6120,8409 6131,8413 6135,8424 6144,8445